# Altium PCB KNX-RELAY-8CH_V1.2.PcbDoc
Units mm, origin at the board's own origin, x right, y up, seen from the top; angles counter-clockwise.
Board outline 84.5 x 96.5 mm, 2 copper layers (F.Cu, B.Cu); 101 components, 88 nets, 303 pads, 99 vias.
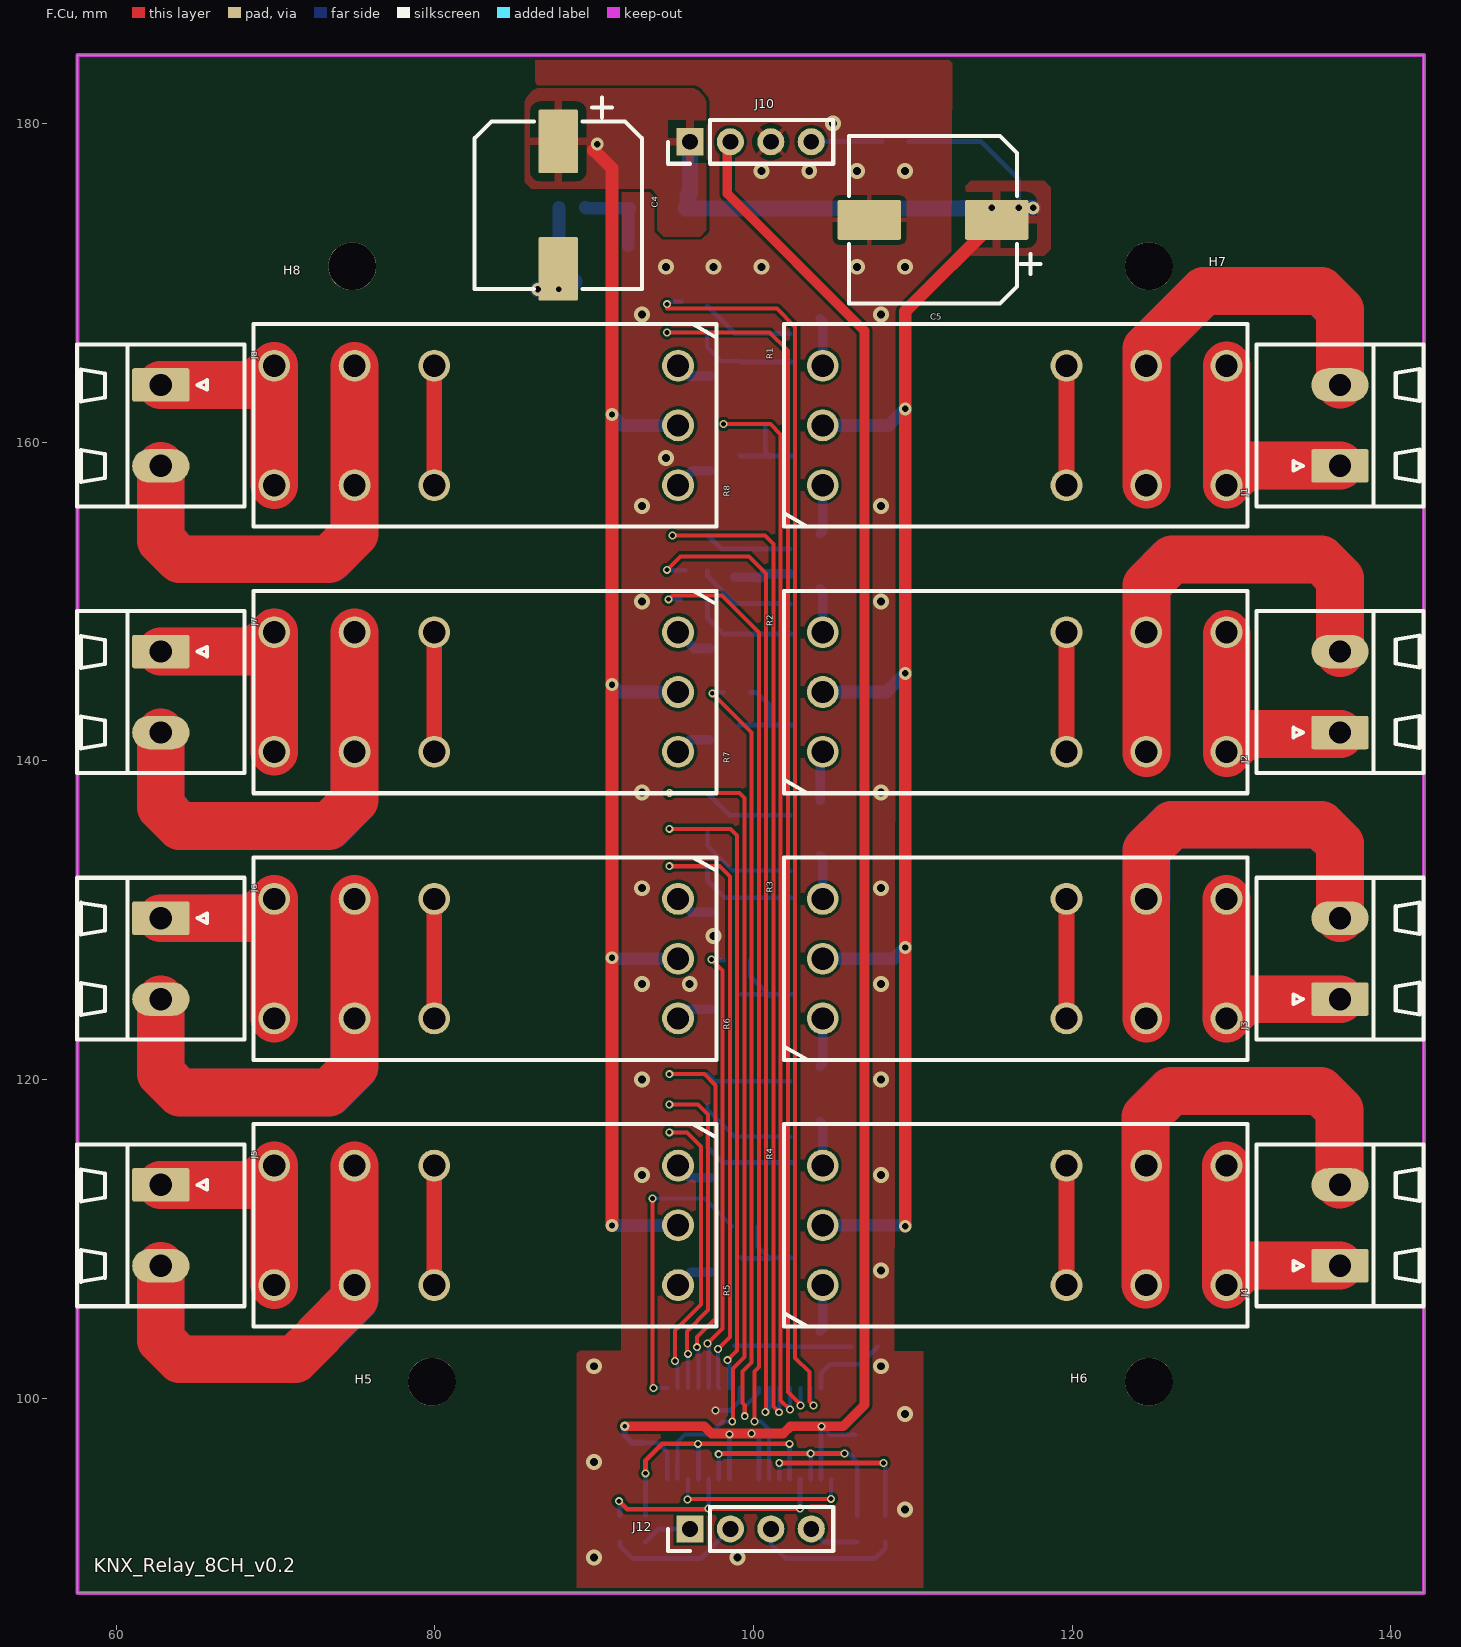
[diagram p0: F.Cu view]
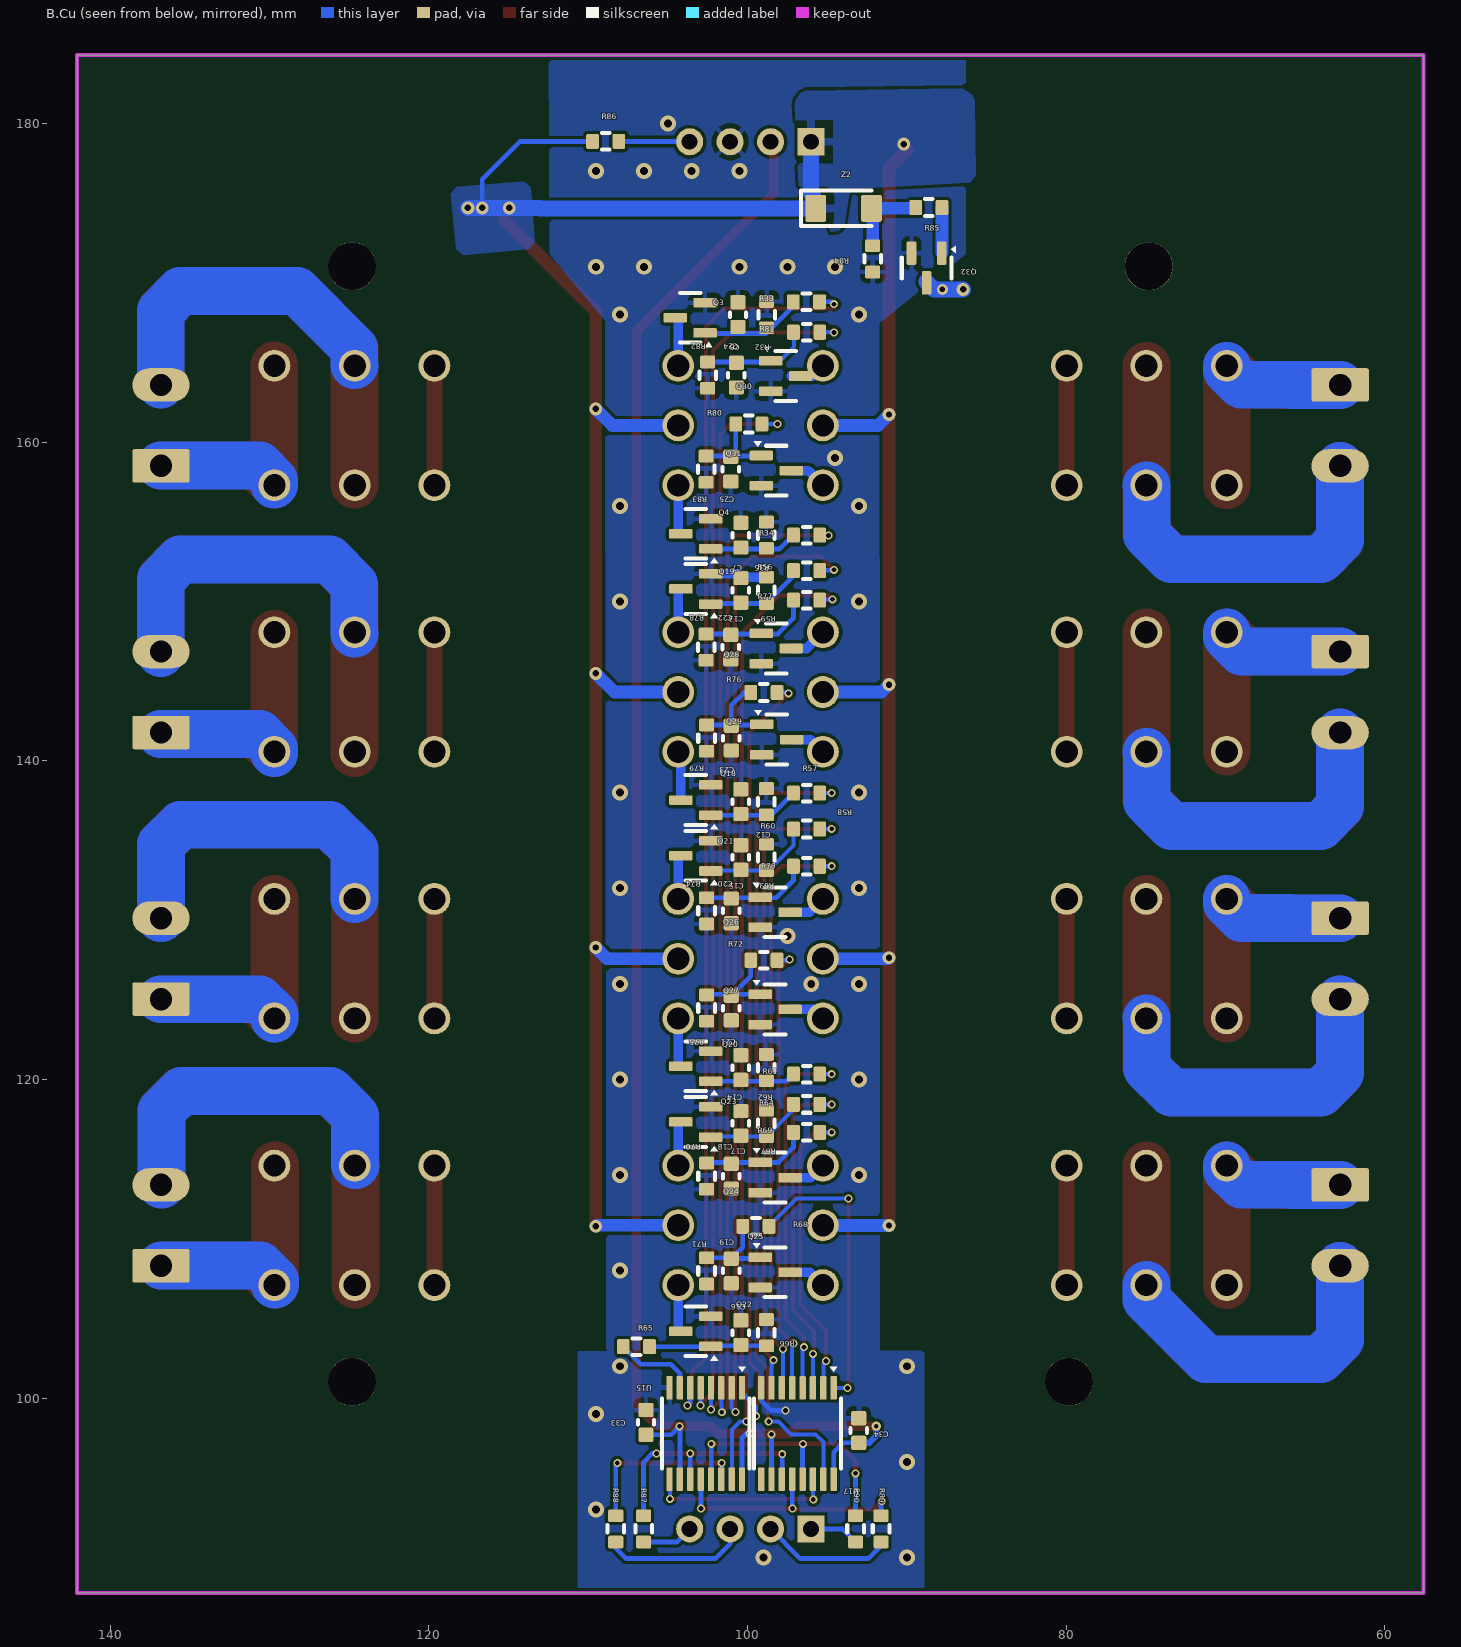
[diagram p1: B.Cu view, seen from below]

## Layer stack, top to bottom
F.Mask: solder mask 0.0102, Solder Resist, Dk 3.5
F.Cu: signal copper 0.0356
Dielectric 1: dielectric 0.32, FR-4, Dk 4.8
B.Cu: signal copper 0.0356
B.Mask: solder mask 0.0102, Solder Resist, Dk 3.5

## Board outline
57.568,87.78 57.568,184.28 142.068,184.28 142.068,87.78

## Design rules (kind name [scope] priority, off if disabled: settings)
Clearance [All] p1: gap=0.2 ignorepadtopadclearanceinfootprint=TRUE
Clearance "Clearence 0,5_Polygon" [InNamedPolygon('F.Cu-') OR InNamedPolygon('B.Cu-') OR InNamedPolygon('F.Cu--1') OR InNamedPolygon('B.Cu--1')] p2: gap=0.5 ignorepadtopadclearanceinfootprint=FALSE
Clearance "Clearence 0,4_Polygon" [InNamedPolygon('F.Cu--2') OR InNamedPolygon('B.Cu--2')] p3: gap=0.4 ignorepadtopadclearanceinfootprint=FALSE
Clearance "Clearence 0,3_Polygon" [InNamedPolygon('F.Cu--3') OR InNamedPolygon('B.Cu--3')] p4: gap=0.3 ignorepadtopadclearanceinfootprint=FALSE
Clearance "Clearence 0,2_NetClass" [InNetClass('Default')] p5: gap=0.2 ignorepadtopadclearanceinfootprint=FALSE
ComponentClearance ComponentClearance_1 [IsComponent And OnLayer('F.Cu') vs IsComponent And OnLayer('B.Cu')] p1: gap=-1 collisioncheckmode=3 verticalgap=0 showdistances=TRUE donotcheckwithout3dbody=TRUE checkcomponentboundary=TRUE
ComponentClearance [All] p2: gap=0 collisioncheckmode=3 verticalgap=0 showdistances=FALSE
MinimumSolderMaskSliver [All] p1: minsoldermaskwidth=0
PolygonConnect Polygon_B.Cu--3_ConnectDirect [IsNamedPolygon('B.Cu--3') vs IsVia] p1: connectstyle=Direct reliefconductorwidth=0.254 reliefentries=4 polygonreliefangle="90 Angle" airgapwidth=0.254
PolygonConnect Polygon_B.Cu--3_ConnectRelief45 [IsNamedPolygon('B.Cu--3') vs (IsThruPin or IsSMTPin) and (PadShape_AllLayers = 'Round')] p2: connectstyle=Relief reliefconductorwidth=0.3 reliefentries=4 polygonreliefangle="45 Angle" airgapwidth=0.3
PolygonConnect Polygon_B.Cu--3_ConnectRelief90 [IsNamedPolygon('B.Cu--3') vs (IsThruPin or IsSMTPin) and (PadShape_AllLayers <> 'Round')] p3: connectstyle=Relief reliefconductorwidth=0.3 reliefentries=4 polygonreliefangle="90 Angle" airgapwidth=0.3
PolygonConnect Polygon_F.Cu--3_ConnectDirect [IsNamedPolygon('F.Cu--3') vs IsVia] p4: connectstyle=Direct reliefconductorwidth=0.254 reliefentries=4 polygonreliefangle="90 Angle" airgapwidth=0.254
PolygonConnect Polygon_F.Cu--3_ConnectRelief45 [IsNamedPolygon('F.Cu--3') vs (IsThruPin or IsSMTPin) and (PadShape_AllLayers = 'Round')] p5: connectstyle=Relief reliefconductorwidth=0.3 reliefentries=4 polygonreliefangle="45 Angle" airgapwidth=0.3
PolygonConnect Polygon_F.Cu--3_ConnectRelief90 [IsNamedPolygon('F.Cu--3') vs (IsThruPin or IsSMTPin) and (PadShape_AllLayers <> 'Round')] p6: connectstyle=Relief reliefconductorwidth=0.3 reliefentries=4 polygonreliefangle="90 Angle" airgapwidth=0.3
PolygonConnect Polygon_B.Cu--2_ConnectDirect [IsNamedPolygon('B.Cu--2') vs IsVia] p7: connectstyle=Direct reliefconductorwidth=0.254 reliefentries=4 polygonreliefangle="90 Angle" airgapwidth=0.254
PolygonConnect Polygon_B.Cu--2_ConnectRelief45 [IsNamedPolygon('B.Cu--2') vs (IsThruPin or IsSMTPin) and (PadShape_AllLayers = 'Round')] p8: connectstyle=Relief reliefconductorwidth=0.3 reliefentries=4 polygonreliefangle="45 Angle" airgapwidth=0.3
PolygonConnect Polygon_B.Cu--2_ConnectRelief90 [IsNamedPolygon('B.Cu--2') vs (IsThruPin or IsSMTPin) and (PadShape_AllLayers <> 'Round')] p9: connectstyle=Relief reliefconductorwidth=0.3 reliefentries=4 polygonreliefangle="90 Angle" airgapwidth=0.3
PolygonConnect Polygon_F.Cu--2_ConnectDirect [IsNamedPolygon('F.Cu--2') vs IsVia] p10: connectstyle=Direct reliefconductorwidth=0.254 reliefentries=4 polygonreliefangle="90 Angle" airgapwidth=0.254
PolygonConnect Polygon_F.Cu--2_ConnectRelief45 [IsNamedPolygon('F.Cu--2') vs (IsThruPin or IsSMTPin) and (PadShape_AllLayers = 'Round')] p11: connectstyle=Relief reliefconductorwidth=0.3 reliefentries=4 polygonreliefangle="45 Angle" airgapwidth=0.3
PolygonConnect Polygon_F.Cu--2_ConnectRelief90 [IsNamedPolygon('F.Cu--2') vs (IsThruPin or IsSMTPin) and (PadShape_AllLayers <> 'Round')] p12: connectstyle=Relief reliefconductorwidth=0.3 reliefentries=4 polygonreliefangle="90 Angle" airgapwidth=0.3
PolygonConnect Polygon_B.Cu--1_ConnectDirect [IsNamedPolygon('B.Cu--1') vs IsVia] p13: connectstyle=Direct reliefconductorwidth=0.254 reliefentries=4 polygonreliefangle="90 Angle" airgapwidth=0.254
PolygonConnect Polygon_B.Cu--1_ConnectRelief45 [IsNamedPolygon('B.Cu--1') vs (IsThruPin or IsSMTPin) and (PadShape_AllLayers = 'Round')] p14: connectstyle=Relief reliefconductorwidth=0.5 reliefentries=4 polygonreliefangle="45 Angle" airgapwidth=0.5
PolygonConnect Polygon_B.Cu--1_ConnectRelief90 [IsNamedPolygon('B.Cu--1') vs (IsThruPin or IsSMTPin) and (PadShape_AllLayers <> 'Round')] p15: connectstyle=Relief reliefconductorwidth=0.5 reliefentries=4 polygonreliefangle="90 Angle" airgapwidth=0.5
PolygonConnect Polygon_F.Cu--1_ConnectDirect [IsNamedPolygon('F.Cu--1') vs IsVia] p16: connectstyle=Direct reliefconductorwidth=0.254 reliefentries=4 polygonreliefangle="90 Angle" airgapwidth=0.254
PolygonConnect Polygon_F.Cu--1_ConnectRelief45 [IsNamedPolygon('F.Cu--1') vs (IsThruPin or IsSMTPin) and (PadShape_AllLayers = 'Round')] p17: connectstyle=Relief reliefconductorwidth=0.5 reliefentries=4 polygonreliefangle="45 Angle" airgapwidth=0.5
PolygonConnect Polygon_F.Cu--1_ConnectRelief90 [IsNamedPolygon('F.Cu--1') vs (IsThruPin or IsSMTPin) and (PadShape_AllLayers <> 'Round')] p18: connectstyle=Relief reliefconductorwidth=0.5 reliefentries=4 polygonreliefangle="90 Angle" airgapwidth=0.5
PolygonConnect Polygon_B.Cu-_ConnectDirect [IsNamedPolygon('B.Cu-') vs IsVia] p19: connectstyle=Direct reliefconductorwidth=0.254 reliefentries=4 polygonreliefangle="90 Angle" airgapwidth=0.254
PolygonConnect Polygon_B.Cu-_ConnectRelief45 [IsNamedPolygon('B.Cu-') vs (IsThruPin or IsSMTPin) and (PadShape_AllLayers = 'Round')] p20: connectstyle=Relief reliefconductorwidth=0.5 reliefentries=4 polygonreliefangle="45 Angle" airgapwidth=0.5
PolygonConnect Polygon_B.Cu-_ConnectRelief90 [IsNamedPolygon('B.Cu-') vs (IsThruPin or IsSMTPin) and (PadShape_AllLayers <> 'Round')] p21: connectstyle=Relief reliefconductorwidth=0.5 reliefentries=4 polygonreliefangle="90 Angle" airgapwidth=0.5
PolygonConnect Polygon_F.Cu-_ConnectDirect [IsNamedPolygon('F.Cu-') vs IsVia] p22: connectstyle=Direct reliefconductorwidth=0.254 reliefentries=4 polygonreliefangle="90 Angle" airgapwidth=0.254
PolygonConnect Polygon_F.Cu-_ConnectRelief45 [IsNamedPolygon('F.Cu-') vs (IsThruPin or IsSMTPin) and (PadShape_AllLayers = 'Round')] p23: connectstyle=Relief reliefconductorwidth=0.5 reliefentries=4 polygonreliefangle="45 Angle" airgapwidth=0.5
PolygonConnect Polygon_F.Cu-_ConnectRelief90 [IsNamedPolygon('F.Cu-') vs (IsThruPin or IsSMTPin) and (PadShape_AllLayers <> 'Round')] p24: connectstyle=Relief reliefconductorwidth=0.5 reliefentries=4 polygonreliefangle="90 Angle" airgapwidth=0.5
RoutingVias [All] p1: holewidth=0.711 width=1.27 viastyle="Through Hole" minholewidth=0.711 minwidth=1.27 maxholewidth=0.711 maxwidth=1.27
SilkToSilkClearance [All] p1: silktosilkclearance=0
SilkToSolderMaskClearance [IsPad] p1: minsilkscreentomaskgap=0 clearancetoexposedcopper=TRUE
SolderMaskExpansion [All] p1: expansion=0 istentingtop=FALSE
SupplyNets "Schematic Supply Nets_2" [InNet('+3V3')] p1: voltage=0.000
SupplyNets "Schematic Supply Nets_1" [InNet('GND')] p2: voltage=0.000
SupplyNets "Schematic Supply Nets" [InNet('+12V')] p3: voltage=0.000
Width [All] p1: maxlimit=10 minlimit=0.2 preferedwidth=0.2 minimp=50.000000 maximp=50.000000 favimp=50.000000
26 further rules are at their usual default settings.

## Classes and differential pairs
component class "Shift register": C33 C34 U15 U17
component class RELAYS: C6 C7 C12 C13 C14 C15 C16 C17 C18 C19 C20 C21 C22 C23 C24 C25 Q3 Q4 Q18 Q19 Q20 Q21 Q22 Q23 Q24 Q25 Q26 Q27 Q28 Q29 Q30 Q31 R1 R2 R3 R4 R5 R6 R7 R8 R32 R33 R34 R35 R56 R57 R58 R59 R60 R61 R62 R63 R64 R65 R66 R67 R68 R69 R70 R71 R72 R73 R74 R75 R76 R77 R78 R79 R80 R81 R82 R83
component class KNX-RELAY-8CH_V2: C4 C5 H5 H6 H7 H8 J1 J2 J3 J4 J5 J6 J7 J8 J10 J11 J12 Q32 R84 R85 R86 R87 R88 R89 R90 Z2

## Components (designator, comment, footprint, x,y, rotation, side; value= is the part's Value field where it differs from the comment)
C4 "1000uf/16V" CP_Elec_10x10 87.747,174.869 r270 top
C5 "1000uf/16V" CP_Elec_10x10 111.268,173.944 r180 top
C6 "100nF" C_0603_1608Metric 100.6,168 r90 bottom
C7 "100nF" C_0603_1608Metric 100.418,154.157 r90 bottom
C12 "100nF" C_0603_1608Metric 100.418,137.43 r90 bottom
C13 "100nF" C_0603_1608Metric 100.418,150.694 r90 bottom
C14 "100nF" C_0603_1608Metric 100.418,120.744 r90 bottom
C15 "100nF" C_0603_1608Metric 100.418,133.93 r90 bottom
C16 "100nF" C_0603_1608Metric 100.418,104.107 r90 bottom
C17 "100nF" C_0603_1608Metric 100.418,117.244 r90 bottom
C18 "100nF" C_0603_1608Metric 101.018,113.93 r270 bottom
C19 "100nF" C_0603_1608Metric 101.018,107.98 r270 bottom
C20 "100nF" C_0603_1608Metric 101.018,130.58 r270 bottom
C21 "100nF" C_0603_1608Metric 101.018,124.48 r270 bottom
C22 "100nF" C_0603_1608Metric 101.047,147.13 r270 bottom
C23 "100nF" C_0603_1608Metric 101.018,141.418 r270 bottom
C24 "100nF" C_0603_1608Metric 100.7,164.2 r270 bottom
C25 "100nF" C_0603_1608Metric 101.047,158.294 r270 bottom
C33 "100nF/50V" C_0603_1608Metric 106.368,98.48 r90 bottom
C34 "100nF/50V" C_0603_1608Metric 93.018,97.968 r90 bottom
H5 "MountingHole" MountingHole_3mm 79.818,101.03 r90 top
H6 "MountingHole" MountingHole_3mm 124.818,101.03 r90 top
H7 "MountingHole" MountingHole_3mm 124.818,171.03 r90 top
H8 "MountingHole" MountingHole_3mm 74.818,171.03 r90 top
J1 "DG129-5.08-02P-14-00AH" DG129-5.08-02P 136.807,158.504 r90 top
J2 "DG129-5.08-02P-14-00AH" DG129-5.08-02P 136.807,141.771 r90 top
J3 "DG129-5.08-02P-14-00AH" DG129-5.08-02P 136.807,125.038 r90 top
J4 "DG129-5.08-02P-14-00AH" DG129-5.08-02P 136.807,108.304 r90 top
J5 "DG129-5.08-02P-14-00AH" DG129-5.08-02P 62.807,113.384 r270 top
J6 "DG129-5.08-02P-14-00AH" DG129-5.08-02P 62.807,130.118 r270 top
J7 "DG129-5.08-02P-14-00AH" DG129-5.08-02P 62.807,146.851 r270 top
J8 "DG129-5.08-02P-14-00AH" DG129-5.08-02P 62.807,163.584 r270 top
J10 "Conn_01x04" PinHeader_1x04_P2.54mm_Vertical 96.008,178.844 r90 top
J12 "Conn_01x04" PinHeader_1x04_P2.54mm_Vertical 96.008,91.794 r90 top
Q3 "2N7002ET1G" SOT-23 103.6,167.8 r180 bottom
Q4 "2N7002ET1G" SOT-23 103.247,154.244 r180 bottom
Q18 "2N7002ET1G" SOT-23 103.247,137.532 r180 bottom
Q19 "2N7002ET1G" SOT-23 103.247,150.782 r180 bottom
Q20 "2N7002ET1G" SOT-23 103.247,120.832 r180 bottom
Q21 "2N7002ET1G" SOT-23 103.247,134.032 r180 bottom
Q22 "2N7002ET1G" SOT-23 103.247,104.194 r180 bottom
Q23 "2N7002ET1G" SOT-23 103.247,117.332 r180 bottom
Q24 "2N7002ET1G" SOT-23 98.268,113.843 r0 bottom
Q25 "2N7002ET1G" SOT-23 98.268,107.893 r0 bottom
Q26 "2N7002ET1G" SOT-23 98.268,130.493 r0 bottom
Q27 "2N7002ET1G" SOT-23 98.268,124.393 r0 bottom
Q28 "2N7002ET1G" SOT-23 98.197,147.043 r0 bottom
Q29 "2N7002ET1G" SOT-23 98.168,141.33 r0 bottom
Q30 "2N7002ET1G" SOT-23 97.607,164.144 r0 bottom
Q31 "2N7002ET1G" SOT-23 98.197,158.207 r0 bottom
Q32 "2N7002ET1G" SOT-23 88.76,170.923 r90 bottom
R1 "RT314F12" RELAY9-500X1142_618 104.347,161.044 r0 top
R2 "RT314F12" RELAY9-500X1142_618 104.347,144.311 r0 top
R3 "RT314F12" RELAY9-500X1142_618 104.347,127.578 r0 top
R4 "RT314F12" RELAY9-500X1142_618 104.347,110.844 r0 top
R5 "RT314F12" RELAY9-500X1142_618 95.267,110.844 r180 top
R6 "RT314F12" RELAY9-500X1142_618 95.267,127.578 r180 top
R7 "RT314F12" RELAY9-500X1142_618 95.267,144.311 r180 top
R8 "RT314F12" RELAY9-500X1142_618 95.267,161.044 r180 top
R32 "10K" R_0603_1608Metric 98.8,168 r90 bottom
R33 "1K" R_0603_1608Metric 96.3,168.8 r0 bottom
R34 "1K" R_0603_1608Metric 96.289,154.157 r0 bottom
R35 "10K" R_0603_1608Metric 98.818,154.157 r90 bottom
R56 "1K" R_0603_1608Metric 96.289,151.93 r0 bottom
R57 "1K" R_0603_1608Metric 96.289,137.966 r0 bottom
R58 "10K" R_0603_1608Metric 98.818,137.43 r90 bottom
R59 "10K" R_0603_1608Metric 98.818,150.694 r90 bottom
R60 "1K" R_0603_1608Metric 96.289,135.716 r0 bottom
R61 "1K" R_0603_1608Metric 96.289,120.33 r0 bottom
R62 "10K" R_0603_1608Metric 98.818,120.744 r90 bottom
R63 "10K" R_0603_1608Metric 98.818,133.93 r90 bottom
R64 "1K" R_0603_1608Metric 96.289,118.43 r0 bottom
R65 "1K" R_0603_1608Metric 106.968,103.23 r180 bottom
R66 "10K" R_0603_1608Metric 98.818,104.107 r90 bottom
R67 "10K" R_0603_1608Metric 98.818,117.244 r90 bottom
R68 "1K" R_0603_1608Metric 99.468,110.78 r0 bottom
R69 "1K" R_0603_1608Metric 96.289,116.68 r0 bottom
R70 "10K" R_0603_1608Metric 102.568,113.93 r270 bottom
R71 "10K" R_0603_1608Metric 102.568,107.98 r270 bottom
R72 "1K" R_0603_1608Metric 98.968,127.48 r0 bottom
R73 "1K" R_0603_1608Metric 96.289,133.38 r0 bottom
R74 "10K" R_0603_1608Metric 102.568,130.58 r270 bottom
R75 "10K" R_0603_1608Metric 102.568,124.48 r270 bottom
R76 "1K" R_0603_1608Metric 98.968,144.28 r0 bottom
R77 "1K" R_0603_1608Metric 96.289,150.08 r0 bottom
R78 "10K" R_0603_1608Metric 102.597,147.13 r270 bottom
R79 "10K" R_0603_1608Metric 102.568,141.418 r270 bottom
R80 "1K" R_0603_1608Metric 99.918,161.13 r0 bottom
R81 "1K" R_0603_1608Metric 96.289,166.894 r0 bottom
R82 "10K" R_0603_1608Metric 102.5,164.2 r270 bottom
R83 "10K" R_0603_1608Metric 102.597,158.294 r270 bottom
R84 "10K" R_0603_1608Metric 92.147,171.494 r270 bottom
R85 "10K" R_0603_1608Metric 88.622,174.723 r180 bottom
R86 "0R" R_0603_1608Metric 108.897,178.869 r0 bottom
R87 "33R" R_0603_1608Metric 106.518,91.794 r270 bottom
R88 "33R" R_0603_1608Metric 108.268,91.794 r270 bottom
R89 "33R" R_0603_1608Metric 91.618,91.794 r270 bottom
R90 "33R" R_0603_1608Metric 93.218,91.794 r270 bottom
U15 "74HC595PW,118" TSSOP-16_4.4x5mm_P0.65mm 102.618,97.78 r90 bottom
U17 "74HC595PW,118" TSSOP-16_4.4x5mm_P0.65mm 96.868,97.78 r90 bottom
Z2 "6.8V" D_MiniMELF 93.972,174.669 r0 bottom

## Footprints (in the part's own frame and the unit in brackets; to place one, negate y for a bottom-side part, rotate by r counter-clockwise, add the part's x,y. Pads: shape width x height; smd on the part's side, far side on the other; paste and mask are expansions set on the pad)
C_0603_1608Metric [mm]
  rrect25% 0.9x0.95 smd mask+0: 1(0.775,0) 2(-0.775,0)
  silkscreen extent -0.14,-0.51 0.14,0.51
CP_Elec_10x10 [mm]
  rrect10% 4x2.5 smd mask+0: 1(-4,0) 2(4,0)
  silkscreen extent -6.75,-5.26 5.26,5.26
D_MiniMELF [mm]
  rrect19% 1.3x1.7 smd mask+0: 1(1.75,0) 2(-1.75,0)
  silkscreen extent -1.75,-1.11 2.66,1.11
DG129-5.08-02P [mm]
  rrect12% 2.1x3.6 hole 1.4 mask+0: 1(0,0)
  rrect100% 2.1x3.6 hole 1.4 mask+0: 2(5.08,0)
  silkscreen extent -2.54,-5.25 7.62,5.25
MountingHole_3mm [mm]
  round 3 hole 3 mask+0: Un1(0,0)
PinHeader_1x04_P2.54mm_Vertical [mm]
  rect 1.7x1.7 hole 1 mask+0: 1(0,0)
  round 1.7 hole 1 mask+0: 2(0,-2.54) 3(0,-5.08) 4(0,-7.62)
  silkscreen extent -1.38,-9 1.38,1.38
R_0603_1608Metric [mm]
  rrect25% 0.8x0.95 smd mask+0: 1(0.825,0) 2(-0.825,0)
  silkscreen extent -0.24,-0.52 0.24,0.52
RELAY9-500X1142_618 [mm]
  round 2 hole 1.4 mask+0: 11(20.3,-3.75) 11(20.3,3.75) 12(15.3,-3.75) 12(15.3,3.75) 14(25.34,-3.75) 14(25.34,3.75) A1(0,-3.75) A2(0,3.75) A3(0,0)
  silkscreen extent -2.42,-6.35 26.65,6.35
SOT-23 [mm]
  rrect25% 1.475x0.6 smd mask+0: 1(0.937,-0.95) 2(0.937,0.95) 3(-0.937,0)
  silkscreen extent -0.65,-1.84 1.4,1.56
TSSOP-16_4.4x5mm_P0.65mm [mm]
  rrect25% 1.475x0.4 smd mask+0: 1(2.863,-2.275) 2(2.863,-1.625) 3(2.863,-0.975) 4(2.863,-0.325) 5(2.863,0.325) 6(2.863,0.975) 7(2.863,1.625) 8(2.863,2.275) 9(-2.863,2.275) 10(-2.863,1.625) 11(-2.863,0.975) 12(-2.863,0.325) 13(-2.863,-0.325) 14(-2.863,-0.975) 15(-2.863,-1.625) 16(-2.863,-2.275)
  silkscreen extent -2.2,-2.74 4.19,2.74

## Part data
C4 C5: library part C_US, Package=CP_Elec_10x10, MF=SUSCON, MP=CDL016M102G10PKKKV00R, OZD=CDL016M102G10PKKKV00R
C6 C7 C12 C13 C14 C15 C16 C17 C18 C19 C20 C21 C22 C23 C24 C25: library part C_3, Package=C_0603, MF=YAGEO, MP=CC0603KRX7R9BB104
C33 C34: library part C, Package=C_0603, MF=YAGEO, MP=CC0603KRX7R9BB104
J1 J2 J3 J4 J5 J6 J7 J8: library part Screw_Terminal_01x02, Package="THT V/T  5.08mm", MF=DEGSON, MP=DG129-5.08-02P-14-00AH, OZD=DG129-5.08-02P-14-00AH
Q3 Q4 Q18 Q19 Q20 Q21 Q22 Q23 Q24 Q25 Q26 Q27 Q28 Q29 Q30 Q31 Q32: library part Q_NMOS_Depletion_GSD, Package=SOT-23, MF=onsemi, MP=2N7002ET1G, OZD=2N7002ET1G
R1 R2 R3 R4 R5 R6 R7 R8: library part RT314A03, Package=DIP,29x12.7mm, MF="TE Connectivity", MP=RT314F12, OZD=RT314F12
R32 R33 R34 R35 R56 R57 R58 R59 R60 R61 R62 R63 R64 R65 R66 R67 R68 R69 R70 R71 R72 R73 R74 R75 R76 R77 R78 R79 R80 R81 R82 R83 R84 R85 R86 R87 R88 R89 R90: library part R_US, Package=R_0603
  R32 R35 R58 R59 R62 R63 R66 R67 R70 R71 R74 R75 R78 R79 R82 R83 R84 R85: MF=FOJAN, MP=FRC0603J103TS
  R33 R34 R56 R57 R60 R61 R64 R65 R68 R69 R72 R73 R76 R77 R80 R81: MF=YAGEO, MP=RC0603JR-071KL, OZD=RC0603JR-071KL
  R87 R88 R89 R90: MF=YAGEO, MP=RC0603JR-0733RL, OZD=RC0603JR-0733RL
U15 U17: library part 74HC595, Package=TSSOP-16, MF=Nexperia, MP=74HC595PW,118
Z2: library part D_Zener, Package=D_MiniMELF, MF=PANJIT, MP=ZMM55-C6V8_R1_10001, OZD=ZMM55-C6V8_R1_10001

## Via types
v1: diameter 0.5, hole 0.3, F.Cu to B.Cu, tented both sides, 47 vias
v2: diameter 1, hole 0.5, F.Cu to B.Cu, tented both sides, 37 vias
v3: diameter 0.8, hole 0.4, F.Cu to B.Cu, tented both sides, 13 vias
v4: diameter 0.7, hole 0.35, F.Cu to B.Cu, tented both sides, 1 vias
v5: diameter 0.6, hole 0.3, F.Cu to B.Cu, tented both sides, 1 vias

## Nets (pads, with @x,y where several pads share a name; then routed paths per layer and width w, separated by ;. In a path a pad name is that pad's centre, name@x,y a point inside that pad or via, vN(x,y) a via of type N, cw(c..) or ccw(c..) an arc to the next point about the centre after c; other vN are vias at no path point)
+3V3: C33.2 C34.2 J10.2 U15.10 U15.16 U17.10 U17.16 | length 115.9
  F.Cu w0.6: v5(91.918,98.23) 96.918,98.23 97.367,97.781 99.169,97.781 99.17,97.78 v1(99.868,97.78) 99.869,97.781 101.869,97.781 102.318,98.23 v1(104.268,98.23) 105.618,98.23 106.968,99.58 106.968,166.98 98.352,175.596 J10.2@98.352,178.894
  B.Cu w0.3: C34.2 94.006,97.193 94.593,96.605 U17.16 ; U17.10 v1(98.493,97.73) ; v1(99.868,97.78) 100.068,97.78 100.343,97.505 U15.16 ; U15.10 104.243,98.205 v1(104.268,98.23) 104.793,97.705 C33.2
  B.Cu w0.4: v5(91.918,98.23) 91.918,97.63 92.356,97.193 C34.2
+12V: C4.1 C5.1 J10.1 R1.A3 R2.A3 R3.A3 R4.A3 R5.A3 R6.A3 R7.A3 R8.A3 R86.1 Z2.1 | length 208.4
  F.Cu w0.8: 89.947,178.294 90.004,178.294 91.118,177.18 v3(91.118,161.73) v3(91.118,144.78) v3(91.118,127.63) v3(91.118,110.83) ; v3(109.518,110.78) v3(109.518,128.28) v3(109.518,145.48) v3(109.518,162.08) 109.518,168.194 C5.1
  B.Cu w0.3: R86.1 114.272,178.869 116.647,176.494 v3(116.647,174.694)
  B.Cu w0.8: v3(91.118,110.83) 95.253,110.83 R5.A3 ; v3(91.118,127.63) 91.171,127.578 R6.A3 ; v3(91.118,144.78) 91.587,144.311 R7.A3 ; v3(91.118,161.73) 91.804,161.044 R8.A3 ; R4.A3 109.454,110.844 v3(109.518,110.78) ; R3.A3 108.816,127.578 v3(109.518,128.28) ; R2.A3 108.349,144.311 v3(109.518,145.48) ; R1.A3 108.483,161.044 v3(109.518,162.08)
  B.Cu w1: J10.1 96.008,175.605 95.872,175.469 95.872,174.819 Z2.1 113.022,174.669 113.047,174.694 v3(114.947,174.694) v3(116.647,174.694) v3(117.547,174.694)
  other v3: 90.2,178.7
GND: C5.2 C6.1 C7.1 C12.1 C13.1 C14.1 C15.1 C16.1 C17.1 C18.1 C19.1 C20.1 C21.1 C22.1 C23.1 C24.1 C25.1 C33.1 C34.1 J10.3 Q3.2 Q4.2 Q18.2 Q19.2 Q20.2 Q21.2 Q22.2 Q23.2 Q24.2 Q25.2 Q26.2 Q27.2 Q28.2 Q29.2 Q30.2 Q31.2 Q32.2 R32.1 R35.1 R58.1 R59.1 R62.1 R63.1 R66.1 R67.1 R70.1 R71.1 R74.1 R75.1 R78.1 R79.1 R82.1 R83.1 R84.1 U15.8 U17.8 | length 6.2
  B.Cu w0.3: v1(97.618,99.23) 98.533,99.23 99.143,99.84 U17.8
  B.Cu w0.6: R59.1 100.368,151.519 C13.1 100.681,151.732 Q19.2
  other v2: 90,90 99,90 109.5,93 90,96 109.5,99 90,102 108,102 108,108 93,114 108,114 93,120 108,120 93,126 96,126 108,126 97.5,129 93,132 108,132 93,138 108,138 93,150 108,150 93,156 108,156 94.5,159 93,168 108,168 94.5,171 97.5,171 100.5,171 106.5,171 109.5,171 100.5,177 103.5,177 106.5,177 109.5,177 105,180
NetC4_2: C4.2 Q32.3 | length 2.5
  B.Cu w1: v3(86.468,169.58) 87.168,169.58 v4(87.768,169.58) 88.29,169.58 88.329,169.619 Q32.3@88.781,170.071
NetC6_2: C6.2 Q3.1 R32.2 R33.1 | length 5.9
  B.Cu w0.3: R33.1@97.114,168.53 97.114,168.523 98.594,167.044 98.818,166.819 100.418,166.819 102.272,166.819 Q3.1@102.31,166.782
NetC7_2: C7.2 Q4.1 R34.1 R35.2 | length 5.6
  B.Cu w0.3: R34.1 97.977,153.294 Q4.1
NetC12_2: C12.2 Q18.1 R57.1 R58.2 | length 5.8
  B.Cu w0.3: R57.1 98.498,136.582 Q18.1
NetC13_2: C13.2 Q19.1 R56.1 R59.2 | length 6.3
  B.Cu w0.3: R56.1 97.114,151.573 R59.2 102.272,149.869 Q19.1
NetC14_2: C14.2 Q20.1 R61.1 R62.2 | length 5.4
  B.Cu w0.3: R61.1 97.563,119.882 Q20.1
NetC15_2: C15.2 Q21.1 R60.1 R63.2 | length 6.9
  B.Cu w0.254: R60.1 97.114,134.684 98.693,133.105 R63.2 102.286,133.105 Q21.1
NetC16_2: C16.2 Q22.1 R65.1 R66.2 | length 7.3
  B.Cu w0.3: R66.2 102.272,103.282 Q22.1 102.324,103.23 R65.1
NetC17_2: C17.2 Q23.1 R64.1 R67.2 | length 6.2
  B.Cu w0.254: R64.1 97.114,118.123 R67.2 102.272,116.419 Q23.1
NetC18_2: C18.2 Q24.1 R69.1 R70.2 | length 6.8
  B.Cu w0.3: R69.1 97.114,115.734 98.056,114.793 Q24.1 102.531,114.793 R70.2
NetC19_2: C19.2 Q25.1 R68.1 R71.2 | length 5.7
  B.Cu w0.3: Q25.1 99.293,108.755 C19.2 ; R68.1 100.293,109.48 C19.2 ; R71.2 101.068,108.805 C19.2
NetC20_2: C20.2 Q26.1 R73.1 R74.2 | length 6.8
  B.Cu w0.3: R73.1 97.114,132.484 98.193,131.405 R74.2
NetC21_2: C21.2 Q27.1 R72.1 R75.2 | length 6.1
  B.Cu w0.3: Q27.1 102.531,125.343 R75.2 ; R72.1 99.793,126.48 C21.2
NetC22_2: C22.2 Q28.1 R77.1 R78.2 | length 7
  B.Cu w0.3: R77.1 97.114,148.934 98.093,147.955 R78.2
NetC23_2: C23.2 Q29.1 R76.1 R79.2 | length 6.3
  B.Cu w0.3: Q29.1 99.143,142.243 R79.2 ; R76.1 100.218,144.28 101.018,143.48 C23.2
NetC24_2: C24.2 Q30.1 R81.1 R82.2 | length 6.9
  B.Cu w0.254: R81.1@97.093,166.98 97.093,165.955 97.954,165.094 Q30.1@99.135,165.094
  B.Cu w0.3: Q30.1@99.135,165.094 99.21,165.019 101.047,165.019 R82.2@102.597,165.019
NetC25_2: C25.2 Q31.1 R80.1 R83.2 | length 5.7
  B.Cu w0.3: Q31.1 99.172,159.119 R83.2 ; R80.1 100.743,159.373 C25.2
NetJ11_1: J12.4 R87.1 | length 3.2
  B.Cu w0.3: J12.4 104.453,90.969 R87.1
NetJ11_3: J12.3 R88.1 | length 9.2
  B.Cu w0.3: J12.3 101.088,90.86 102.018,89.93 107.618,89.93 108.268,90.58 R88.1
NetJ11_5: J12.2 R89.1 | length 8.3
  B.Cu w0.3: R89.1 91.618,90.73 92.418,89.93 96.684,89.93 J12.2
NetJ11_7: J12.1 R90.1 | length 3.1
  B.Cu w0.3: R90.1 94.043,91.794 J12.1
NetQ3_3: Q3.3 R1.A2 | length 3
  B.Cu w0.6: Q3.3@104.185,167.732 104.347,167.569 R1.A2
NetQ4_3: Q4.3 R1.A1 | length 3.1
  B.Cu w0.6: Q4.3 104.347,154.407 R1.A1
NetQ18_3: Q18.3 R2.A1 | length 3.1
  B.Cu w0.6: Q18.3 104.185,140.399 R2.A1
NetQ19_3: Q19.3 R2.A2 | length 2.8
  B.Cu w0.6: Q19.3 104.347,150.619 R2.A2
NetQ20_3: Q20.3 R3.A1 | length 3.1
  B.Cu w0.6: Q20.3 104.347,120.994 R3.A1
NetQ21_3: Q21.3 R3.A2 | length 2.8
  B.Cu w0.6: Q21.3 104.347,133.869 R3.A2
NetQ22_3: Q22.3 R4.A1 | length 3
  B.Cu w0.6: Q22.3 104.347,104.357 R4.A1
NetQ23_3: Q23.3 R4.A2 | length 2.8
  B.Cu w0.6: Q23.3 104.347,117.169 R4.A2
NetQ24_3: Q24.3 R5.A1 | length 2.4
  B.Cu w0.6: R5.A1 96.019,113.843 Q24.3
NetQ25_3: Q25.3 R5.A2 | length 2.4
  B.Cu w0.6: R5.A2 96.065,107.893 Q25.3
NetQ26_3: Q26.3 R6.A1 | length 2.4
  B.Cu w0.6: R6.A1 96.102,130.493 Q26.3
NetQ27_3: Q27.3 R6.A2 | length 2.3
  B.Cu w0.6: R6.A2 95.832,124.393 Q27.3
NetQ28_3: Q28.3 R7.A1 | length 2.4
  B.Cu w0.6: R7.A1 96.286,147.043 Q28.3
NetQ29_3: Q29.3 R7.A2 | length 2.3
  B.Cu w0.6: R7.A2 96.036,141.33 Q29.3
NetQ30_3: Q30.3 R8.A1 | length 2.3
  B.Cu w0.6: R8.A1 95.917,164.144 Q30.3@97.26,164.144
NetQ31_3: Q31.3 R8.A2 | length 2.4
  B.Cu w0.6: R8.A2 96.18,158.207 Q31.3
NetQ32_1: Q32.1 R85.1 | length 2.8
  B.Cu w0.8: Q32.1@87.797,171.873 R85.1
NetR84_2: R84.2 R85.2 Z2.2 | length 5.2
  B.Cu w0.8: R85.2 89.5,174.669 Z2.2 92.147,174.594 R84.2
NetU15_9: U15.9 U17.14 | length 11.6
  F.Cu w0.254: v1(95.868,93.63) 95.918,93.68 v1(104.868,93.68)
  B.Cu w0.254: v1(95.868,93.63) 95.893,93.655 U17.14 ; v1(104.868,93.68) 104.868,94.893 U15.9
R1_A1: R34.2 U15.3 | length 63.5
  F.Cu w0.254: v1(94.918,154.13) 100.718,154.13 101.253,153.595 101.253,99.47 v1(101.61,99.114)
  B.Cu w0.254: v1(94.918,154.13) 95.667,154.13 R34.2@95.693,154.157 ; v1(101.61,99.114) 101.643,99.148 U15.3
R1_A2: R33.2 U15.6 | length 78.8
  F.Cu w0.254: 94.568,168.38 101.468,168.38 102.618,167.23 102.618,102.53 103.52,101.628 103.52,99.778 v1(103.768,99.53)
  B.Cu w0.254: U15.6 103.593,99.705 v1(103.768,99.53)
  B.Cu w0.3: v1(94.579,168.65) 94.729,168.8 R33.2
R1_COM: J1.2 R1.11 | length 47.2
  F.Cu w3: R1.11@124.658,157.32 124.658,165.87 128.261,169.473 135.629,169.473 136.818,168.284 J1.2@136.818,163.61
  B.Cu w3: R1.11@124.658,164.82 124.679,164.841 124.679,165.88 128.272,169.473 135.579,169.473 136.818,168.234 J1.2@136.818,163.61
R1_NC: R1.12 | length 7.5
  F.Cu w1: R1.12@119.647,157.294 R1.12@119.647,164.794
R1_NO: J1.1 R1.14 | length 22.9
  F.Cu w3: R1.14@129.698,164.82 129.698,157.32 130.908,158.53 J1.1@136.818,158.53
  B.Cu w3: R1.14@129.698,157.32 129.698,157.591 130.629,158.523 133.679,158.523 133.687,158.53 J1.1@136.818,158.53
R2_A1: R57.2 U17.15 | length 52.5
  F.Cu w0.254: v1(94.718,137.98) 99.118,137.98 99.433,137.665 99.433,102.58 98.718,101.865 98.718,98.581 v1(98.668,98.531)
  B.Cu w0.254: v1(94.718,137.98) 94.733,137.966 R57.2 ; 95.218,96.03 95.218,94.943 U17.15 95.243,97.255 95.718,97.73 97.268,97.73 98.069,98.531 v1(98.668,98.531)
R2_A2: R56.2 U15.2 | length 62.7
  F.Cu w0.254: v1(94.568,151.98) 95.418,152.83 99.718,152.83 100.798,151.75 100.798,151.48 100.798,151.58 100.798,99.183 v1(100.745,99.13)
  B.Cu w0.254: v1(94.568,151.98) 94.593,151.955 95.718,151.955 R56.2@95.743,151.93 ; v1(100.745,99.13) 100.993,99.378 U15.2
R2_COM: J2.2 R2.11 | length 49.6
  F.Cu w3: R2.11@124.658,140.47 124.658,147.97 124.658,151.001 126.279,152.623 135.629,152.623 136.818,151.434 J2.2@136.818,146.76
  B.Cu w3: R2.11@124.658,147.97 124.679,147.991 124.679,151.073 126.229,152.623 135.579,152.623 136.818,151.384 J2.2@136.818,146.76
R2_NC: R2.12 | length 7.5
  F.Cu w1: R2.12@119.647,140.561 R2.12@119.647,148.061
R2_NO: J2.1 R2.14 | length 22.9
  F.Cu w3: R2.14@129.698,147.97 129.698,140.47 130.908,141.68 J2.1@136.818,141.68
  B.Cu w3: R2.14@129.698,140.47 129.698,140.741 130.629,141.673 133.679,141.673 133.687,141.68 J2.1@136.818,141.68
R3_A1: R61.2 U17.4 | length 23.4
  F.Cu w0.254: v1(94.718,120.33) 96.918,120.33 97.613,119.635 97.613,104.981 96.457,103.825 v1(96.457,103.195)
  B.Cu w0.254: v1(94.718,120.33) R61.2 ; v1(96.457,103.195) 96.543,103.109 U17.4
R3_A2: R60.2 U17.7 | length 40.2
  F.Cu w0.254: v1(94.718,135.73) 98.568,135.73 98.978,135.32 98.978,104.294 98.978,102.99 v1(98.368,102.38)
  B.Cu w0.254: v1(94.718,135.73) 94.733,135.716 R60.2 ; v1(98.368,102.38) 98.493,102.255 U17.7
R3_COM: J3.2 R3.11 | length 49.6
  F.Cu w3: R3.11@124.647,123.828 124.647,131.328 124.647,134.359 126.268,135.98 135.618,135.98 136.807,134.791 J3.2
  B.Cu w3: R3.11@124.647,131.328 124.668,131.349 124.668,134.43 126.218,135.98 135.568,135.98 136.807,134.741 J3.2
R3_NC: R3.12 | length 7.5
  F.Cu w1: R3.12@119.647,123.828 R3.12@119.647,131.328
R3_NO: J3.1 R3.14 | length 22.9
  F.Cu w3: R3.14@129.687,131.328 129.687,123.828 130.897,125.038 J3.1
  B.Cu w3: R3.14@129.687,123.828 129.687,124.099 130.618,125.03 133.668,125.03 133.676,125.038 J3.1
R4_A1: R65.2 U15.7 | length 5.2
  B.Cu w0.3: U15.7 104.243,101.555 104.818,102.13 106.693,102.13 R65.2
R4_A2: R64.2 U17.3 | length 21.2
  F.Cu w0.254: v1(94.718,118.43) 96.518,118.43 97.158,117.79 97.158,105.52 95.819,104.18 95.819,102.855 v1(95.893,102.78)
  B.Cu w0.254: v1(94.718,118.43) R64.2 ; U17.3 v1(95.893,102.78)
R4_COM: J4.2 R4.11 | length 49.6
  F.Cu w3: R4.11@124.608,107.12 124.608,114.62 124.608,117.651 126.229,119.273 135.579,119.273 136.768,118.084 J4.2@136.768,113.41
  B.Cu w3: R4.11@124.608,114.62 124.629,114.641 124.629,117.723 126.179,119.273 135.529,119.273 136.768,118.034 J4.2@136.768,113.41
R4_NC: R4.12 | length 7.5
  F.Cu w1: R4.12@119.647,107.094 R4.12@119.647,114.594
R4_NO: J4.1 R4.14 | length 22.9
  F.Cu w3: R4.14@129.648,114.62 129.648,107.12 130.858,108.33 J4.1@136.768,108.33
  B.Cu w3: R4.14@129.648,107.12 129.648,107.391 130.579,108.323 133.629,108.323 133.637,108.33 J4.1@136.768,108.33
R5_A1: R69.2 U17.2 | length 19
  F.Cu w0.254: v1(94.718,116.68) 95.818,116.68 96.703,115.795 96.703,105.865 95.068,104.23 v1(95.068,102.33)
  B.Cu w0.254: v1(94.718,116.68) R69.2 ; v1(95.068,102.33) 95.243,102.155 U17.2
R5_A2: R68.2 U17.1 | length 18.5
  F.Cu w0.254: v1(93.668,112.53) 93.668,101.53 93.668,100.68 v1(93.718,100.63)
  B.Cu w0.254: v1(93.668,112.53) 96.918,112.53 97.418,112.03 98.643,110.805 R68.2 ; v1(93.718,100.63) 94.581,100.63 U17.1
R5_COM: J5.2 R5.11 | length 47
  F.Cu w3: J5.2 62.807,103.631 63.996,102.442 71.23,102.442 72.718,103.93 72.718,103.992 74.967,106.241 74.967,107.094 R5.11@74.967,114.594
  B.Cu w3: J5.2 62.807,103.681 64.046,102.442 71.23,102.442 74.967,106.179 R5.11@74.967,107.094
R5_NC: R5.12 | length 7.5
  F.Cu w1: R5.12@79.967,107.094 R5.12@79.967,114.594
R5_NO: J5.1 R5.14 | length 22.9
  F.Cu w3: J5.1 68.717,113.384 69.927,114.594 R5.14@69.927,107.094
  B.Cu w3: J5.1 65.938,113.384 65.946,113.392 68.996,113.392 69.927,114.323 R5.14@69.927,114.594
R6_A1: R73.2 U17.6 | length 37.3
  F.Cu w0.254: v1(94.718,133.38) 97.878,133.38 98.523,132.735 98.523,104.195 98.523,103.838 v1(97.77,103.085)
  B.Cu w0.254: v1(94.718,133.38) R73.2 ; v1(97.77,103.085) 97.77,100.716 U17.6
R6_A2: R72.2 U17.5 | length 28.4
  F.Cu w0.254: v1(97.12,103.43) 98.068,104.378 98.068,105.28 98.068,126.83 v1(97.368,127.53)
  B.Cu w0.254: v1(97.12,103.43) 97.193,103.357 U17.5 ; v1(97.368,127.53) 97.418,127.48 R72.2
R6_COM: J6.2 R6.11 | length 49.6
  F.Cu w3: J6.2 62.807,120.364 63.996,119.175 73.346,119.175 74.967,120.796 74.967,123.828 R6.11@74.967,131.328
  B.Cu w3: J6.2 62.807,120.414 64.046,119.175 73.396,119.175 74.946,120.725 74.946,123.806 R6.11@74.967,123.828
R6_NC: R6.12 | length 7.5
  F.Cu w1: R6.12@79.967,123.828 R6.12@79.967,131.328
R6_NO: J6.1 R6.14 | length 22.9
  F.Cu w3: J6.1 68.717,130.118 69.927,131.328 R6.14@69.927,123.828
  B.Cu w3: J6.1 65.938,130.118 65.946,130.125 68.996,130.125 69.927,131.056 R6.14@69.927,131.328
R7_A1: R77.2 U15.15 | length 61.4
  F.Cu w0.254: v1(94.668,150.13) 94.918,150.38 98.018,150.38 100.343,148.055 100.343,101.955 100.068,101.68 v1(100.068,98.531)
  B.Cu w0.254: v1(94.668,150.13) 95.414,150.13 R77.2 ; v1(100.068,98.531) 100.467,98.531 100.968,98.03 100.968,94.943 U15.15
R7_A2: R76.2 U15.1 | length 49.6
  F.Cu w0.254: v1(97.418,144.23) 99.888,141.76 99.888,102.23 99.318,101.66 99.318,99.685 99.453,99.55 v1(99.453,98.865)
  B.Cu w0.254: v1(97.418,144.23) 97.468,144.28 R76.2 ; v1(99.453,98.865) 99.453,99.474 100.343,100.364 U15.1
R7_COM: J7.2 R7.11 | length 49.6
  F.Cu w3: J7.2 62.807,137.097 63.996,135.909 73.346,135.909 74.967,137.53 74.967,140.561 R7.11@74.967,148.061
  B.Cu w3: J7.2 62.807,137.147 64.046,135.909 73.396,135.909 74.946,137.459 74.946,140.54 R7.11@74.967,140.561
R7_NC: R7.12 | length 7.5
  F.Cu w1: R7.12@79.967,140.561 R7.12@79.967,148.061
R7_NO: J7.1 R7.14 | length 22.9
  F.Cu w3: J7.1 68.717,146.851 69.927,148.061 R7.14@69.927,140.561
  B.Cu w3: J7.1 65.938,146.851 65.946,146.859 68.996,146.859 69.927,147.79 R7.14@69.927,148.061
R8_A1: R81.2 U15.5 | length 76.6
  F.Cu w0.254: v1(94.568,166.88) 101.013,166.88 102.163,165.73 102.163,100.38 102.943,99.6 v1(102.943,99.53)
  B.Cu w0.254: v1(94.568,166.88) 94.583,166.894 R81.2@95.443,166.894 ; v1(102.943,99.53) U15.5
R8_A2: R80.2 U15.4 | length 67.6
  F.Cu w0.254: v1(98.118,161.13) 101.058,161.13 101.708,160.48 101.708,99.86 v1(102.29,99.279)
  B.Cu w0.254: v1(98.118,161.13) R80.2 ; v1(102.29,99.279) 102.293,99.282 U15.4
R8_COM: J8.2 R8.11 | length 49.6
  F.Cu w3: J8.2 62.807,153.831 63.996,152.642 73.346,152.642 74.967,154.263 74.967,157.294 R8.11@74.967,164.794
  B.Cu w3: J8.2 62.807,153.881 64.046,152.642 73.396,152.642 74.946,154.192 74.946,157.273 R8.11@74.967,157.294
R8_NC: R8.12 | length 7.5
  F.Cu w1: R8.12@79.967,157.294 R8.12@79.967,164.794
R8_NO: J8.1 R8.14 | length 22.9
  F.Cu w3: J8.1 68.717,163.584 69.927,164.794 R8.14@69.927,157.294
  B.Cu w3: J8.1 65.938,163.584 65.946,163.592 68.996,163.592 69.927,164.523 R8.14@69.927,164.794
Relay_ADC: J10.4 R86.2 | length 4.7
  B.Cu w0.3: J10.4@103.432,178.894 103.457,178.869 R86.2
Shift_O\E\: R90.2 U15.13 U17.13 | length 17.4
  F.Cu w0.3: v1(93.218,95.28) 93.218,96.08 94.268,97.13 v1(96.518,97.13) v1(102.268,97.13)
  B.Cu w0.3: R90.2 v1(93.218,95.28) ; v1(96.518,97.13) 96.543,97.105 U17.13 ; v1(102.268,97.13) 102.268,94.943 U15.13
ShiftReg_Latch: R89.2 U15.12 U17.12 | length 16.2
  F.Cu w0.3: v1(91.568,93.53) 92.068,93.03 97.118,93.03 v1(97.168,93.08) v1(102.918,93.08)
  B.Cu w0.3: v1(91.568,93.53) 91.618,93.48 R89.2 ; v1(97.168,93.08) 97.193,93.105 U17.12 ; v1(102.918,93.08) 102.918,94.893 U15.12
ShiftRegCLK: R87.2 U15.11 U17.11 | length 15.5
  F.Cu w0.3: v1(97.818,96.48) 97.868,96.53 v1(103.593,96.53) v1(105.718,96.53)
  B.Cu w0.3: v1(97.818,96.48) 97.818,94.943 U17.11 ; U15.11 v1(103.593,96.53) ; v1(105.718,96.53) 105.968,96.53 106.518,95.98 R87.2
ShiftRegDATA: R88.2 U15.14 | length 10.9
  F.Cu w0.3: v1(101.618,95.93) v1(108.168,95.93)
  B.Cu w0.3: v1(101.618,95.93) 101.618,94.943 U15.14 ; v1(108.168,95.93) 108.268,95.83 R88.2
pads on no net: H5.Un1 H6.Un1 H7.Un1 H8.Un1 U17.9

## Polygon pours and split planes (outlines as drawn)
GND on F.Cu "F.Cu--2" (solid, remove dead copper, pour order 10): 112.468,184.28 112.417,171.78 108.93,167.625 108.828,87.774 91.68,87.774 91.73,167.47 86.318,171.794 86.318,184.28
+12V on F.Cu "F.Cu--1" (solid, remove dead copper, pour order 6): 85.647,181.346 85.743,181.607 86.131,182.059 86.425,182.194 96.263,182.194 96.567,182.055 96.958,181.598 97.047,181.358 97.047,173.294 96.647,172.894 94.372,172.894 93.972,173.294 93.972,175.494 93.572,175.894 86.054,175.894 85.654,176.301
+12V on F.Cu "F.Cu-" (solid, remove dead copper, pour order 8): 113.247,175.994 113.647,176.394 118.247,176.394 118.647,175.994 118.647,172.094 118.247,171.694 113.683,171.694 113.284,172.128
GND on F.Cu "F.Cu--3" (solid, remove dead copper, pour order 11): 88.918,102.98 110.668,102.93 110.668,87.78 88.918,87.774
+12V on B.Cu "B.Cu--1" (solid, remove dead copper, pour order 5): 85.74,181.427 85.879,181.724 86.322,182.105 86.562,182.192 96.36,182.057 96.684,181.885 96.986,181.447 97.042,181.25 96.668,173.337 96.209,172.96 94.263,173.251 93.927,173.586 93.622,175.572 93.247,175.911 86.05,176.281 85.67,176.697
GND on B.Cu "B.Cu--2" (solid, remove dead copper, pour order 12): 112.468,184.28 112.417,171.78 108.93,167.625 108.828,87.774 91.68,87.774 91.73,167.47 86.318,171.794 86.318,184.28
GND on B.Cu "B.Cu--3" (solid, remove dead copper, pour order 9): 88.918,102.98 110.668,102.93 110.668,87.78 88.918,87.774
+12V on B.Cu "B.Cu-" (solid, remove dead copper, pour order 7): 113.613,175.998 114.044,176.363 118.243,176.027 118.61,175.591 118.284,172.09 117.851,171.729 113.72,172.09 113.361,172.559

## Keep-outs
Keep-Out Layer:
  the board outline again, w0.254

## Silkscreen, mask and mechanical layers (free items; w line width, h text height)
F.SilkS:
  text "KNX_Relay_8CH_v0.2" at 58.597,88.771 h1.5
Edge.Cuts:
  circle w0.254: c124.818,101.03 r1.5
  circle w0.254: c124.818,171.03 r1.5
  circle w0.254: c74.818,101.03 r1.5
  circle w0.254: c74.818,171.03 r1.5
  lines w0.254: 57.568,87.78 142.068,87.78 142.068,184.28 57.568,184.28 57.568,87.78 ; 82.568,103.53 86.068,103.53 86.068,168.03 82.568,168.03 82.568,103.53 ; 114.068,103.53 117.568,103.53 117.568,168.03 114.068,168.03 114.068,103.53